# Altium PCB USB-C Charger.PcbDoc
Units mil, origin at the board's own origin, x right, y up, seen from the top; angles counter-clockwise.
Board outline 2450 x 800 mil, 2 copper layers (Top Layer, Bottom Layer); 29 components, 19 nets, 133 pads, 20 vias.
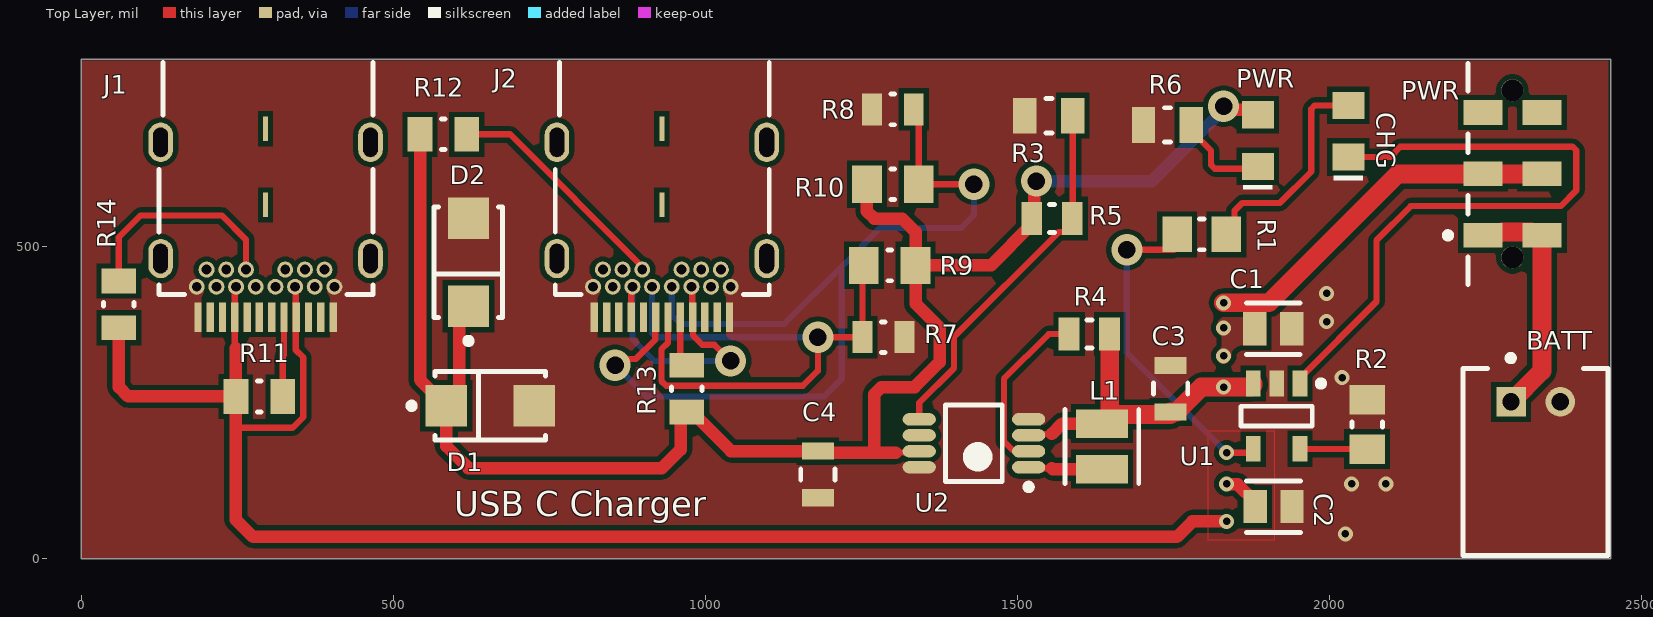
[diagram p0: Top Layer view]
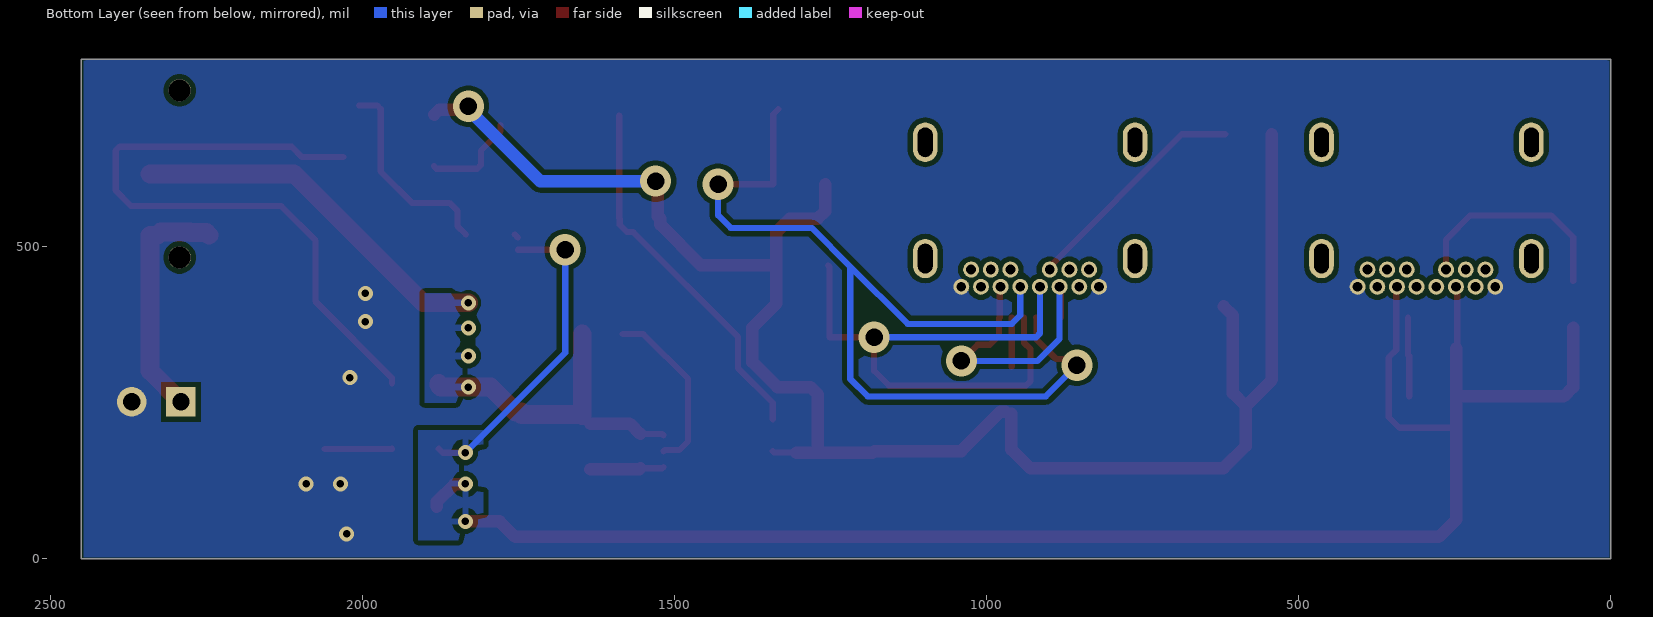
[diagram p1: Bottom Layer view, seen from below]
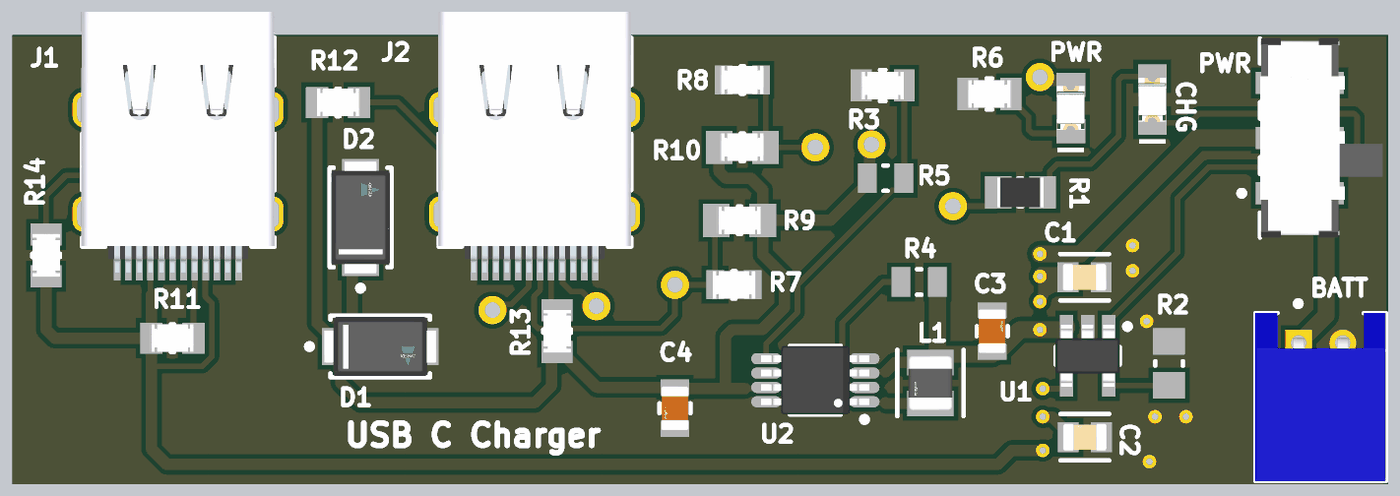
[diagram p2: 3D render of the assembled board from above, using the file's embedded part models]

## Layer stack, top to bottom
Top Solder: solder mask 0.4, Solder Resist, Dk 3.5
Top Layer: signal copper 1.4
Dielectric 1: dielectric 12.6, FR-4, Dk 4.8
Bottom Layer: signal copper 1.4
Bottom Solder: solder mask 0.4, Solder Resist, Dk 3.5

## Board outline
0,0 2450,0 2450,800 0,800

## Design rules (kind name [scope] priority, off if disabled: settings)
Clearance [All] p1: gap=8 ignorepadtopadclearanceinfootprint=TRUE
MinimumSolderMaskSliver [All] p1: minsoldermaskwidth=4
PolygonConnect [All] p1: connectstyle=Direct reliefconductorwidth=10 reliefentries=4 polygonreliefangle="90 Angle" airgapwidth=10
RoutingVias [All] p1: holewidth=28 width=50 viastyle="Through Hole" minholewidth=28 minwidth=50 maxholewidth=28 maxwidth=50
SilkToSolderMaskClearance [IsPad] p1: minsilkscreentomaskgap=5 clearancetoexposedcopper=TRUE
SolderMaskExpansion [All] p1: expansion=0 istentingtop=FALSE
SupplyNets "Schematic Supply Nets_1" [InNet('+5')] p1: voltage=0.000
SupplyNets "Schematic Supply Nets" [InNet('GND')] p2: voltage=0.000
Width PowerNets [InNetClass('PowerNets')] p1: maxlimit=50 minlimit=5 preferedwidth=20 minimp=50.000000 maximp=50.000000 favimp=50.000000
Width [All] p2: maxlimit=10 minlimit=10 preferedwidth=10
28 further rules are at their usual default settings.

## Classes and differential pairs
net class PowerNets: 5VIN +5 NetBATT_1 NetC1_1 NetL1_2
component class "Step-Up DC-DC Converter": C3 C4 D1 D2 L1 pwr R3 R4 R5 R6 R7 R8 R9 R10 R12 R13 U2
component class "Charge Controller": BATT C1 C2 CHG J1 PWR R1 R2 R11 R14 U1

## Components (designator, comment, footprint, x,y, rotation, side; value= is the part's Value field where it differs from the comment)
BATT "BATT" JST-S2B-PH-K-S_V 2330,155 r0 top
C1 "4.7uf" FP-C0805C475K8PACTU-MFG 1909.53,368.5 r0 top
C2 "4.7uf" FP-C0805C475K8PACTU-MFG 1910,83.5 r0 top
C3 "22uF" FP-GRM21B-0_15-MFG 1745,272.4 r90 top
C4 "22uF" FP-GRM21B-0_15-MFG 1180,135 r270 top
CHG "CHG" WL-SMCW_0805_150080xx75000 2030,685 r90 top (schematic designator LED1)
D1 "40V/1.5A" FP-95400-MFG 655,245 r0 top value=134pF
D2 "40V/1.5A" FP-95400-MFG 620,475 r90 top value=134pF
J1 "632723100011" 632723100011 295,620 r180 top
J2 "632723100011" 632723100011 930,620 r180 top
L1 "2.2uH" FP-LQM2HPN_G0-IPC_C 1635,180 r270 top
PWR "PWR" FP-JS102011JAQN-MFG 2292.76,616.57 r90 top (schematic designator SW1)
PWR "PWR" WL-SMCW_0805_150080xx75000 1885,670 r90 top (schematic designator LED2)
R1 "1k" RESC2013X60X35ML10T20 1795,519.68 r0 top
R2 "2k" RESC2013X60X35ML10T20 2060,215 r270 top
R3 "100k" FP-CRCW0805-e3-MFG 1550,710 r0 top
R4 "750k" RESC2013X50X30LL20T20 1615,360 r0 top
R5 "750k" RESC2013X50X30LL20T20 1555,545 r180 top
R6 "4.7k" FP-CRCW0805-e3-MFG 1740,695 r0 top
R7 "49.9k" FP-CRCW0805-e3-IPC_C 1285,355 r180 top
R8 "49.9k" FP-CRCW0805-e3-IPC_C 1300,720 r0 top
R9 "75k" FP-CRCW0805-e3-IPC_A 1295,470 r180 top
R10 "75k" FP-CRCW0805-e3-IPC_A 1300,600 r0 top
R11 "56k" FP-CRCW0805-e3-IPC_B 285,260 r0 top
R12 "56k" FP-CRCW0805-e3-IPC_B 580,680 r0 top
R13 "56k" FP-CRCW0805-e3-IPC_B 970,272.56 r90 top
R14 "56k" FP-CRCW0805-e3-IPC_B 59.95,407.44 r90 top
U1 "MCP73831" SOT95P280X145-5N 1915,228.5 r270 top
U2 "PAM2401" TSOP65P490X110-8N 1430,185 r180 top

## Footprints (in the part's own frame and the unit in brackets; to place one, negate y for a bottom-side part, rotate by r counter-clockwise, add the part's x,y. Pads: shape width x height; smd on the part's side, far side on the other; paste and mask are expansions set on the pad)
632723100011 [mm] "USB 3.1 Type C Receptacle Horizontal THR"
  rect 0.3x1.2 smd: A1(-2.75,5.93) A2(-2.25,5.93) A3(-1.75,5.93) A4(-1.25,5.93) A5(-0.75,5.93) A6(-0.25,5.93) A7(0.25,5.93) A8(0.75,5.93) A9(1.25,5.93) A10(1.75,5.93) A11(2.25,5.93) A12(2.75,5.93)
  round 0.65 hole 0.4: B1(2.8,4.68) B2(2.4,3.98) B3(1.6,3.98) B4(1.2,4.68) B5(0.8,3.98) B6(0.4,4.68) B7(-0.4,4.68) B8(-0.8,3.98) B9(-1.2,4.68) B10(-1.6,3.98) B11(-2.4,3.98) B12(-2.8,4.68) Shell(-2,4.68) Shell(2,4.68)
  oval 1x1.6 hole 0.6 slot 1.2 at 90 deg: Shell(-4.27,3.53) Shell(-4.27,-1.2) Shell(4.27,3.53) Shell(4.27,-1.2)
  rect 0.2x1 smd: Shell(0,1.35) Shell(0,-1.75)
  silkscreen extent -4.37,-4.45 4.34,5, body extent -4.37,-5.62 4.37,6.2, height 3.05
FP-95400-MFG [mm]
  rect 1.7x1.68 smd paste+0 mask+0: 1(-1.79,0) 2(1.79,0)
  silkscreen extent -3.32,-1.4 2.25,1.4, body extent -2.74,-1.5 2.74,1.5, height 0.25
FP-C0805C475K8PACTU-MFG [mm]
  rect 0.95x1.35 smd paste+0 mask+0: 1(-0.75,0) 2(0.75,0)
  silkscreen extent -1.1,-1.05 1.1,1.05, body extent -1.4,-0.85 1.4,0.85, height 0.25
FP-CRCW0805-e3-IPC_A [mil]
  rect 47.5x59.38 smd paste+0 mask+0: 1(-41.37,0) 2(41.37,0)
  silkscreen extent -3,-25 3,25, body extent -85,-49 85,49, height 10
FP-CRCW0805-e3-IPC_B [mil]
  rect 39.63x55.44 smd paste+0 mask+0: 1(-37.44,0) 2(37.44,0)
  silkscreen extent -3,-25 3,25, body extent -67,-38 67,38, height 10
FP-CRCW0805-e3-IPC_C [mil]
  rect 31.75x51.5 smd paste+0 mask+0: 1(-33.5,0) 2(33.5,0)
  silkscreen extent -3,-25 3,25, body extent -53,-31 53,31, height 10
FP-CRCW0805-e3-MFG [mm]
  rect 0.95x1.45 smd paste+0 mask+0: 1(-0.975,0) 2(0.975,0)
  silkscreen extent -0.13,-0.7 0.13,0.7, body extent -1.55,-0.82 1.55,0.82, height 0.25
FP-GRM21B-0_15-MFG [mm]
  rect 0.7x1.3 smd paste+0 mask+0: 1(-0.95,0) 2(0.95,0)
  silkscreen extent -0.23,-0.7 0.23,0.7, body extent -1.4,-0.8 1.4,0.8, height 0.25
FP-JS102011JAQN-MFG [mm]
  rect 1x1.6 smd paste+0 mask+0: 1(-2.5,-1.2) 1(-2.5,1.2) 2(0,1.2) 2(0,-1.2) 3(2.5,-1.2) 3(2.5,1.2)
  round 0.9 hole 0.9 unplated paste-2539.97 mask+0: ""(-3.4,0) ""(3.4,0)
  silkscreen extent -4.5,1.8 4.5,2.75, body extent -4.6,-3.9 4.6,2.1, height 0.25
FP-LQM2HPN_G0-IPC_C [mil]
  rect 45.47x82.92 smd paste+0 mask+0: 1(-36.44,0) 2(36.44,0)
  silkscreen extent -59,-59 59,59, body extent -63,-47 63,47, height 10
JST-S2B-PH-K-S_V [mm] "THD, 2-Leads, Body 7.6x5.9mm, Pitch 2mm"
  rect 1.2x1.2 hole 0.7: 1(-1,2.45)
  round 1.2 hole 0.7: 2(1,2.45)
  silkscreen extent -2.95,-3.8 2.95,4.35, body extent -2.95,-3.8 2.95,3.8, height 4.8
RESC2013X50X30LL20T20 [mm] "Chip Resistor, 2-Leads, Body 2.00x1.25mm, IPC High Density"
  rect 0.85x1.35 smd: 1(-0.825,0) 2(0.825,0)
  silkscreen extent -0.1,-0.58 0.1,0.58, body extent -1.1,-0.72 1.1,0.72, height 0.5
RESC2013X60X35ML10T20 [mm] "Chip Resistor, 2-Leads, Body 2.1x1.35mm, IPC Low Density"
  rect 1.2x1.45 smd: 1(-1,0) 2(1,0)
  silkscreen extent -0.1,-0.63 0.1,0.63, body extent -1.05,-0.68 1.05,0.67, height 0.6
SOT95P280X145-5N [mm] "SOT23, 5-Leads, Body 2.90x2.80mm, Pitch 0.95mm, IPC Medium Density"
  rect 1.05x0.6 smd: 1(-1.325,0.95) 2(-1.325,0) 3(-1.325,-0.95) 4(1.325,-0.95) 5(1.325,0.95)
  silkscreen extent -1.45,-1.45 0.4,1.93, body extent -1.4,-1.45 1.4,1.45, height 1.45
TSOP65P490X110-8N [mm] "TSOP, 8-Leads, Body 3.00x3.00mm, Pitch 0.65mm, IPC Medium Density"
  oval 1.35x0.5 smd: 1(-2.225,0.975) 2(-2.225,0.325) 3(-2.225,-0.325) 4(-2.225,-0.975) 5(2.225,-0.975) 6(2.225,-0.325) 7(2.225,0.325) 8(2.225,0.975)
  silkscreen extent -2.35,-1.55 1.15,1.9, body extent -2.45,-1.55 2.45,1.55, height 1.1
WL-SMCW_0805_150080xx75000 [mm] "SMD Mono-color Chip LED, body 2.0x1.25mm"
  rect 1.1x1.3 smd: 1(-1.05,0) 2(1.05,0)
  silkscreen extent -2,-0.6 -1.8,0.6, body extent -1,-0.63 1,0.62, height 0.7

## Part data
BATT: library part CMP-1755-00004-1, "Male Header, Pitch 2 mm, 1 x 2 Position, Height 4.8 mm, Tail Length 3.4 mm, -25 to 85 degC, RoHS, Bulk", Capacitance="10 uF", Case\Package=Radial, Max Operating Temperature="85 degC", Min Operating Temperature="-40 degC", Package Quantity=200, Tolerance=20%, Voltage Rating="50 V", ComponentLink1Description=Datasheet, ComponentLink1URL=http://www.jst-mfg.com/product/pdf/eng/ePH.pdf, DatasheetVersion=Dec-12, Diameter="5 mm", Height="11 mm", Lead Pitch="2 mm", Length="11 mm", Mount="Through Hole", PackageDescription="Male Header, Pitch 2 mm, 1 x 2 Position, Height 4.8 mm, Tail Length 3.4 mm", PackageReference=S2B-PH-K-S, Packaging=Bulk, Pins=2, Radiation Hardening=No, REACH SVHC="No SVHC", RoHSCompliant=true, Voltage Rating (DC)="50 V"
C1 C2: library part CMP-2007-01007-2, "CAP CER 4.7UF 10V X5R 0805", Capacitance=4.7uF, Case Code (Imperial)=0805, Case Code (Metric)=2012, Dielectric=X5R, Dielectric Material=Ceramic, Max Operating Temperature=85°C, Min Operating Temperature=-55°C, Package Quantity=1, Tolerance=10%, Voltage=10V, Case/Package=0805, Construction=Flat, Depth=1.25mm, Dissipation Factor=5%, Height=1.25mm, Lead Free="Lead Free", Lead Pitch=0.75mm, Length=2mm, Mount="Surface Mount", Number of Pins=2, Packaging="Tape and Reel", Radiation Hardening=No, REACH SVHC="No SVHC", RoHS Compliant=Yes, Series=C, Termination=SMD/SMT, Thickness=0.055inch, Voltage Rating=10V, Voltage Rating (DC)=10V, Width=1.2mm
C3 C4: library part CMP-2007-03385-2, "Chip Multilayer Ceramic Capacitors for General Purpose, 0805, 22uF, X5R, 15%, 20%, 6.3V", Case Code (Imperial)=0805, Case Code (Metric)=2012, Dielectric=X5R, Max Operating Temperature=85°C, Min Operating Temperature=-55°C, Package Quantity=1, Tolerance=20%, Voltage=6.3V, Capacitance=22uF, Case/Package=0805, Depth=1.25mm, Height=1.25mm, Lead Free="Lead Free", Length=2mm, Material=Ceramic, Mount="Surface Mount", Packaging="Tape and Reel", Radiation Hardening=No, REACH SVHC="No SVHC", Termination=SMD/SMT, Thickness=0.053inch, Voltage Rating=6.3V, Voltage Rating (DC)=6.3V, Width=0.049inch
CHG: library part CMP-1426-00010-4, "Led, Red, 630 Nm, 1.9 V, 30 Ma, 60 Mcd Rohs Compliant: Yes", Case Code (Imperial)=0805, Case Code (Metric)=2012, Color=Red, Forward Current=100mA, Forward Voltage=1.9V, Max Junction Temperature (Tj)=95°C, Max Operating Temperature=85°C, Max Reverse Voltage (DC)=5V, Min Operating Temperature=-40°C, Power Dissipation=72mW, Test Current=20mA, Case/Package=0805, Dominant Wavelength=630nm, Height=700µm, Length=2mm, Lens Style="Clear, Rectangular", Luminous Intensity=60mcd, Mount="Surface Mount", Packaging="Tape and Reel", Peak Wavelength=645nm, REACH SVHC=Unknown, Reverse Voltage=5V, RoHS=Compliant, Viewing Angle=140°, Wavelength=630nm, Width=1.25mm
D1 D2: library part CMP-02539-000025-1, "DIODE SCHOTTKY 40V 1.5A SMA", Capacitance=134pF, Forward Current=1.5A, Manufacturer=Vishay, Manufacturer Part Number=VS-15MQ040NTRPBF, Max Junction Temp=+150°C, Max Repetitive Reverse Voltage=40V, Max Surge Forward Current=140A, Package=95400, Peak Reverse Current=0.5mA, Temperature="-40°C to +150°C", Temperature Range Low=-40°C, Automotive=No, Category=Diode, ComponentLink2Description=Datasheet, ComponentLink2URL=http://www.vishay.com/docs/94141/vs-15mq040ntrpbf.pdf, Device Class L1="Discrete Semiconductors", Device Class L2=Diodes, Device Class L3="Schottky Diodes", Digikey Description="DIODE SCHOTTKY 40V 1.5A SMA", Footprint Url=http://www.vishay.com/docs/95400/sma.pdf, Height=2.29mm, Lead Free=Yes, Mouser Description="Schottky Diodes & Rectifiers 2.1 Amp 40 Volt", Octopart=https://octopart.com/vs-15mq040ntrpbf-vishay-44340959, Reverse Voltage=40V, RoHS=TRUE, Standoff Height=0mm, Temperature Range High=+150°C
J1 J2: library part CMP-1502-03213-4, "USB Connector, 24 Contact(s), Female, Right Angle, Solder and Surface Mount Terminal, Receptacle", Contact Resistance=30mΩ, Current Rating=5A, Insulation Resistance=1GΩ, Max Operating Temperature=105°C, Min Operating Temperature=-40°C, Voltage Rating=20V, Connector Type=USB, Contact Material="Gold, Nickel", Gender=Receptacle, Height=3.16mm, Mount="Surface Mount, Through Hole", Number Of Contacts=24, Number of Pins=24, Orientation=Horizontal, Packaging="Tape and Reel", Pin Length=1.5mm, RoHS=Compliant, USB Standard="USB 3.1"
L1: library part CMP-06042-017002-1, "Multilayer Type Inductor for Power Lines, 1008 (2520), 2.2μH, 20%, 0.225Ω, 1100mA", Case/Package=1008, Current Rating=1.1A, DC Resistance (DCR)=225mR, Max Operating Temperature=85°C, Min Operating Temperature=-40°C, Package Quantity=3000, Self Resonant Frequency=40MHz, Test Frequency=1MHz, Tolerance=20%, Height - Seated (Max)=0.039inch, Inductance=2.2uH, Length=0.098inch, Mount="Surface Mount", Packaging="Tape and Reel", RoHS Compliant=Yes, Shielding=Shielded, Width=0.079inch
PWR: library part CMP-10038-000001-1, "SWITCH SLIDE SPDT 300MA 6V", Contact Current Rating=300mA, Contact Resistance=70mΩ, Manufacturer=C&K, Manufacturer Part Number=JS102011JAQN, Temperature="-40°C to +85°C", Temperature Range High=+85°C, Temperature Range Low=-40°C, Voltage Rating Dc=6V, Automotive=No, Category=Switch, ComponentLink2Description=Datasheet, ComponentLink2URL=https://www.ckswitches.com/media/1422/js.pdf, Device Class L1=Electromechanical, Device Class L2=Switches, Device Class L3="Slide Switches", Digikey Description="SWITCH SLIDE SPDT 300MA 6V", Electromechanical Life=5000Cycles, Height=3.5mm, Lead Free=Yes, Mount="Surface Mount", Mouser Description="JS Series Sub-Miniature Slide Switch SPDT Right-Angle SMT", Octopart=https://octopart.com/js102011jaqn-c%26k+components-74831566, Package=JS102011JAQN, RoHS=TRUE, Throw Configuration=SPDT
PWR: library part CMP-1426-00008-7, "Led, Blue, 470 Nm, 3.2 V, 30 Ma, 145 Mcd Rohs Compliant: Yes", Case Code (Imperial)=0805, Case Code (Metric)=2012, Color=Blue, Forward Current=100mA, Forward Voltage=3.2V, Max Junction Temperature (Tj)=95°C, Max Operating Temperature=85°C, Max Reverse Voltage (DC)=5V, Min Operating Temperature=-40°C, Power Dissipation=105mW, Test Current=20mA, Case/Package=0805, Dominant Wavelength=470nm, Height=700µm, Lead Free="Lead Free", Length=2mm, Lens Style="Clear, Rectangular", Luminous Intensity=145mcd, Mount="Surface Mount", Packaging="Tape and Reel", Peak Wavelength=465nm, REACH SVHC=Unknown, Reverse Voltage=5V, RoHS=Compliant, Viewing Angle=140°, Wavelength=470nm, Width=1.25mm
R1: library part CMP-2100-03671-1, "Chip Resistor, 1 KOhm, +/- 1%, 125 mW, -55 to 155 degC, 0805 (2012 Metric), RoHS, Tape and Reel", Case Code (Imperial)=0805, Case Code (Metric)=2012, Manufacturer=Yageo, Max Operating Temperature=155degC, Max Power Dissipation=125mW, Min Operating Temperature=-55degC, Package Description="2-Pin Surface Mounted Device, Body 2 x 1.25 mm", Package Quantity=1, Resistance=1KOhm, Temperature Coefficient=100ppm/degreesC, Tolerance=1%, Voltage Rating=150V, Case/Package=0805, Composition=ThickFilm, Datasheet URL=http://www.yageo.com/NewPortal/yageodocoutput?fileName=/pdf/R-Chip/PYu-RC_Group_51_RoHS_L_5.pdf, Datasheet Version="Rev. 5, 10/2016", Depth=1.25mm, Height=0.024inch, Lead Free=LeadFree, Length=0.079inch, Manufacturer URL=http://www.yageo.com/, Military Standard=Not, Number of Pins=2, Number of Terminations=2, Package Reference=0805, Packaging=TapeandReel, Power Rating=125mW, REACH SVHC=Unknown, RoHSCompliant=true, Termination=SMD/SMT, Voltage Rating (DC)=150V, Width=0.049inch
R2: library part CMP-2001-01361-1, Manufacturer=Yageo, Part Number=RC0805JR-072KL
R3: library part CMP-2001-04899-2, "RES Thick Film, 100kΩ, 1%, 0.125W, 100ppm/°C, 0805", Case Code (Imperial)=0805, Case Code (Metric)=2012, Max Operating Temperature=155°C, Min Operating Temperature=-55°C, Package Quantity=5000, Power Rating=125mW, Resistance=100kR, Temperature Coefficient=100ppm/°C, Tolerance=1%, Voltage Rating=150V, Case/Package=0805, Composition="Thick Film", Contact Plating=Tin, Depth=1.25mm, Height=0.45mm, Lead Free="Lead Free", Length=2mm, Military Standard=Not, Mount="Surface Mount", Number of Pins=2, Packaging="Tape and Reel", Radiation Hardening=No, Termination=SMD/SMT, Voltage Rating (DC)=150V, Weight=0.000194oz, Width=1.25mm
R4 R5: library part CMP-2001-04102-1, Manufacturer="Vishay Dale", Part Number=CRCW0805750KFKEA
R6: library part CMP-2001-03939-2, "RES Thick Film, 47kΩ, 1%, 0.125W, 100ppm/°C, 0805", Case Code (Imperial)=0805, Case Code (Metric)=2012, Max Operating Temperature=155°C, Max Power Dissipation=125mW, Min Operating Temperature=-55°C, Package Quantity=10, Resistance=47kR, Temperature Coefficient=100ppm/°C, Tolerance=1%, Voltage Rating=150V, Case/Package=0805, Composition="Thick Film", Contact Plating=Tin, Depth=1.25mm, Features="Automotive AEC-Q200", Height=0.45mm, Lead Free="Lead Free", Length=2mm, Military Standard=Not, Number of Terminations=2, Packaging="Tape and Reel", Power Rating=125mW, Radiation Hardening=No, Termination=SMD/SMT, Voltage Rating (DC)=150V, Weight=0.000194oz, Width=1.25mm, Working Voltage=150V
R7 R8: library part CMP-2001-03952-2, "RES Thick Film, 49.9kΩ, 1%, 0.125W, 100ppm/°C, 0805", Case Code (Imperial)=0805, Case Code (Metric)=2012, Max Operating Temperature=155°C, Max Power Dissipation=125mW, Min Operating Temperature=-55°C, Package Quantity=10, Resistance=49.9kR, Temperature Coefficient=100ppm/°C, Tolerance=1%, Voltage Rating=150V, Case/Package=0805, Composition="Thick Film", Contact Plating=Tin, Depth=1.25mm, Features="Automotive AEC-Q200", Height=0.45mm, Lead Free="Lead Free", Length=2mm, Military Standard=Not, Mount="Surface Mount", Number of Terminations=2, Packaging="Tape and Reel", Power Rating=125mW, Radiation Hardening=No, Termination=SMD/SMT, Voltage Rating (DC)=150V, Weight=0.000194oz, Width=0.049inch
R9 R10: library part CMP-2001-04106-2, "RES Thick Film, 75kΩ, 1%, 0.125W, 100ppm/°C, 0805", Case Code (Imperial)=0805, Case Code (Metric)=2012, Max Operating Temperature=155°C, Max Power Dissipation=125mW, Min Operating Temperature=-55°C, Package Quantity=10, Resistance=75kR, Resistance Tolerance=1%, Resistor Type="Thick Film", Temperature Coefficient=100ppm/°C, Voltage Rating=150V, Case/Package=0805, Construction=Rectangular, Contact Plating=Tin, Depth=1.25mm, Features="Automotive AEC-Q200", Height=0.45mm, Lead Free="Lead Free", Length=2mm, Military Standard=Not, Mount="Surface Mount", Number of Pins=2, Number of Terminations=2, Packaging="Tape and Reel", Power Rating=125mW, Radiation Hardening=No, RoHS Compliant=Yes, Series=CRCW, Technology="THICK FILM", Termination=SMD/SMT, Tolerance=1%, Voltage Rating (DC)=150V, Weight=0.000194oz, Width=0.049inch, Working Voltage=150V
R11 R12 R13 R14: library part CMP-2001-04015-2, "RES Thick Film, 56kΩ, 1%, 0.125W, 100ppm/°C, 0805", Case Code (Imperial)=0805, Case Code (Metric)=2012, Max Operating Temperature=155°C, Max Power Dissipation=125mW, Min Operating Temperature=-55°C, Package Quantity=10, Resistance=56kR, Temperature Coefficient=100ppm/°C, Tolerance=1%, Voltage Rating=150V, Case/Package=0805, Composition="Thick Film", Contact Plating=Tin, Depth=1.25mm, Features="Automotive AEC-Q200", Height=0.45mm, Lead Free="Lead Free", Length=2mm, Military Standard=Not, Mount="Surface Mount", Number of Pins=2, Number of Terminations=2, Packaging="Tape and Reel", Power Rating=125mW, Radiation Hardening=No, Termination=SMD/SMT, Voltage Rating (DC)=150V, Weight=0.000194oz, Width=1.25mm
U1: "MCP73831 Series Single-Cell Li-Ion/Li-Polymer Battery Charge Controller SOT-23-5", Ambient Temperature Range High=85°C, Case/Package=SOT-23, Drain to Source Resistance=350mΩ, Manufacturer=Microchip, Manufacturer Lifecycle Status=REL, Manufacturer Part Number=MCP73831T-2ACI/OT, Max Charge Current=500mA, Max Junction Temperature (Tj)=125°C, Max Output Voltage=4.5V, Max Power Dissipation=1.54W, Max Supply Voltage=6V, Min Operating Temperature=-40°C, Min Output Voltage=4.168V, Min Supply Voltage=3.75V, Output Voltage=4.2V, Voltage Rating=4.534V, Category="Battery Management", ComponentLink1Description=https://datasheet.octopart.com:443/MCP73831T-2ACI-OT-Microchip-datasheet-8814540.pdf?src-supplier=element14+APAC, ComponentLink1URL=https://datasheet.octopart.com:443/MCP73831T-2ACI-OT-Microchip-datasheet-8814540.pdf?src-supplier=element14+APAC, ComponentLink2Description=https://datasheet.octopart.com:443/MCP73831T-2ACI-OT-Microchip-datasheet-145017548.pdf?src-supplier=Microchip, ComponentLink2URL=https://datasheet.octopart.com:443/MCP73831T-2ACI-OT-Microchip-datasheet-145017548.pdf?src-supplier=Microchip, ComponentLink3Description=https://datasheet.octopart.com:443/MCP73831T-2ACI-OT-Microchip-datasheet-34193478.pdf?src-supplier=Farnell, ComponentLink3URL=https://datasheet.octopart.com:443/MCP73831T-2ACI-OT-Microchip-datasheet-34193478.pdf?src-supplier=Farnell, ComponentLink4Description=https://datasheet.octopart.com:443/MCP73831T-2ACI-OT-Microchip-datasheet-16123459.pdf?src-supplier=LKR, ComponentLink4URL=https://datasheet.octopart.com:443/MCP73831T-2ACI-OT-Microchip-datasheet-16123459.pdf?src-supplier=LKR, ComponentLink5Description=https://datasheet.octopart.com:443/MCP73831T-2ACI-OT-Microchip-datasheet-142675560.pdf?src-supplier=TME, ComponentLink5URL=https://datasheet.octopart.com:443/MCP73831T-2ACI-OT-Microchip-datasheet-142675560.pdf?src-supplier=TME, ComponentLink6Description=https://datasheet.octopart.com:443/MCP73831T-2ACI-OT-Microchip-datasheet-158592061.pdf?src-supplier=SHENGYU+ELECTRONICS, ComponentLink6URL=https://datasheet.octopart.com:443/MCP73831T-2ACI-OT-Microchip-datasheet-158592061.pdf?src-supplier=SHENGYU+ELECTRONICS, ComponentLink7Description=https://datasheet.octopart.com/MCP73831T-2ACI-OT-Microchip-datasheet-16593012.pdf, ComponentLink7URL=https://datasheet.octopart.com/MCP73831T-2ACI-OT-Microchip-datasheet-16593012.pdf, ComponentLink8Description=https://datasheet.octopart.com:443/MCP73831T-2ACI-OT-Microchip-datasheet-7127743.pdf?src-supplier=Newark, ComponentLink8URL=https://datasheet.octopart.com:443/MCP73831T-2ACI-OT-Microchip-datasheet-7127743.pdf?src-supplier=Newark, ComponentLink9Description=https://datasheet.octopart.com:443/MCP73831T-2ACIOT-Microchip-datasheet-39874.pdf?src-supplier=RS+(Formerly+Allied+Electronics), ComponentLink9URL=https://datasheet.octopart.com:443/MCP73831T-2ACIOT-Microchip-datasheet-39874.pdf?src-supplier=RS+(Formerly+Allied+Electronics), ComponentLink10Description=http://sigma.octopart.com:80/188449423/materials_sheet/Microchip-MCP73831T-2ACI-OT.pdf?src-supplier=Compliance+Statements, ComponentLink10URL=http://sigma.octopart.com:80/188449423/materials_sheet/Microchip-MCP73831T-2ACI-OT.pdf?src-supplier=Compliance+Statements, ComponentLink11Description=http://sigma.octopart.com:80/192856963/materials_sheet/Microchip-MCP73831T-2ACI-OT.pdf?src-supplier=Compliance+Statements, ComponentLink11URL=http://sigma.octopart.com:80/192856963/materials_sheet/Microchip-MCP73831T-2ACI-OT.pdf?src-supplier=Compliance+Statements, ComponentLink12Description=http://sigma.octopart.com:80/rohs_statement/Microchip-company-71.pdf?src-supplier=Compliance+Statements, ComponentLink12URL=http://sigma.octopart.com:80/rohs_statement/Microchip-company-71.pdf?src-supplier=Compliance+Statements, ComponentLink13Description=http://sigma.octopart.com:80/reach_statement/Microchip-company-70.pdf?src-supplier=Compliance+Statements, ComponentLink13URL=http://sigma.octopart.com:80/reach_statement/Microchip-company-70.pdf?src-supplier=Compliance+Statements, ComponentLink14Description=http://sigma.octopart.com:80/conflict_mineral_statement/Microchip-company-69.pdf?src-supplier=Compliance+Statements, ComponentLink14URL=http://sigma.octopart.com:80/conflict_mineral_statement/Microchip-company-69.pdf?src-supplier=Compliance+Statements, ComponentLink15Description=http://sigma.octopart.com:80/conflict_mineral_statement/Microchip-company-68.pdf?src-supplier=Compliance+Statements, ComponentLink15URL=http://sigma.octopart.com:80/conflict_mineral_statement/Microchip-company-68.pdf?src-supplier=Compliance+Statements, Contact Plating=Tin, Country of Assembly=Thailand, Country of Fabrication="United States of America", Country of Origin=Thailand, Export Control Classification Number (ECCN) Code=EAR99, Harmonized Tariff Schedule (HTS) Code=8542.39.0060, Height=1.45mm, HS Code=8542.39.0090, Introduction Date=2005-11-03, Length=3.0988mm, Lifecycle Status=Production, Max Operating Temperature=85°C, Mounting Technology="Surface Mount", Nominal Supply Voltage=6V, Number of Cells=1, Number of Channels=1, Number of Outputs=1, Output Current=500mA, Packaging="Cut Tape", Pins=5, Pricing="1=0.545 (USD)", Projected EOL Date=2034-11-03, Radiation Hardening=No, REACH SVHC=No, RoHS=Compliant, Schedule B="8542390000, 8542390000|8542390000|8542390000|8542390000|8542390000", Stock=10360, Supplier=Newark, Supplier Part Number=MCP73831T-2ACI/OT, Termination=SMD/SMT, Weight=200.998119mg, Width=1.8034mm
U2: "1.0MHz STEP-UP DC-DC CONVERTER"

## Via types
v1: diameter 24, hole 12, Top Layer to Bottom Layer, 13 vias
v2: diameter 50, hole 28, Top Layer to Bottom Layer, 7 vias

## Nets (pads, with @x,y where several pads share a name; then routed paths per layer and width w, separated by ;. In a path a pad name is that pad's centre, name@x,y a point inside that pad or via, vN(x,y) a via of type N, cw(c..) or ccw(c..) an arc to the next point about the centre after c; other vN are vias at no path point)
5V: J2.A4 J2.A9 J2.B4 J2.B9 | length 461.6
  Top Layer w10: J2.A9 880.79,433.78 J2.B4 ; J2.B9 978.65,434.35 978.65,387.1 J2.A4 979.99,385.76 979.99,357.53 994.71,342.81 1014.24,342.81 v2(1040.06,317)
  Bottom Layer w10: J2.B4 882.76,352.24 918,317 v2(1040.06,317)
5VIN: C2.1 J1.A4 J1.A9 J1.B4 J1.B9 R1.1 R11.1 R14.1 U1.4 | length 3186.1
  Top Layer w10: 247.56,210 338.35,210 355.25,226.89 355.25,322.59 343.43,334.41 343.43,434.56 J1.B9 ; 247.56,337.44 245.79,339.21 J1.A9 245.79,433.78 J1.B4 ; v2(1675,495) R1.1@1750.63,495 ; R1.1@1750.63,514.68 R1.1 ; v1(1835,170) 1871.26,170 U1.4
  Top Layer w20: R14.1 59.95,275.05 75,260 R11.1 ; 247.56,337.44 R11.1 ; v1(1835,60) 1780,60 1755,35 275,35 247.56,62.44 247.56,210 R11.1 ; v1(1835,120) 1835.77,119.23 1852.62,119.23 1880.47,91.38 C2.1
  Bottom Layer w10: v2(1675,495) 1675,330 v1(1835,170)
+5: C4.1 D1.1 D2.1 PWR.2@1885,711.34 R5.2 R9.1 R10.1 R12.1 R13.1 U2.7 | length 2830.2
  Top Layer w10: 1305,170 1305.35,170.35 1340.35,170.35 U2.7@1342.3,172.3
  Top Layer w20: R12.1 542.56,286.57 584.13,245 D1.1 ; D2.1 605,389.53 605,265.47 D1.1 ; R13.1@960,232.56 960,175 930,145 620,145 584.53,180.47 D1.1 ; R13.1 977.91,235.13 1040.64,172.4 C4.1 1182.4,170 1270,170 ; R10.1 1258.63,556.72 1270.34,545 1315,545 1336.37,523.63 R9.1 ; 1305,170 1270,170 ; v2(1530,605) 1526.26,601.26 1526.26,548.74 R5.2 1522.52,535.16 1457.36,470 R9.1 ; v2(1830.05,725) 1835.79,719.26 1877.08,719.26 PWR.2@1885,711.34 ; 1270,170 1270,263.28 1281.72,275 1335,275 1375,315 1375,370.22 1336.37,408.84 R9.1
  Bottom Layer w20: v2(1530,605) 1715.11,605 1830.05,719.95 v2(1830.05,725)
CC: J1.A5 R11.2 | length 127.4
  Top Layer w10: R11.2 322.44,324.66 324.53,326.75 J1.A5
"CC OUT": J2.A5 R13.2 | length 79.3
  Top Layer w10: J2.A5 959.53,307.91 R13.2@960,307.44
D+: J2.A6 J2.B6 R7.2 R9.2 | length 954.1
  Top Layer w10: J2.A6 939.84,346.11 929.28,335.54 929.28,284.8 936.89,277.19 1155.93,277.19 1180,301.26 v2(1180,355) R7.2 1251.5,467.87 R9.2
  Bottom Layer w10: J2.B6 914.25,360.86 920.11,355 v2(1180,355)
D-: J2.A7 J2.B7 R8.2 R10.2 | length 1561.9
  Top Layer w10: v2(855,310) 865.82,310 875.82,320 888.28,320 919.38,351.1 919.38,385.76 J2.A7 ; R8.2 1341.37,712.13 R10.2 v2(1430,600)
  Bottom Layer w10: v2(855,310) 905,260 1190,260 1218,288 1218,468 ; J2.B7 945.75,390.08 959.53,376.3 1126.3,376.3 1218,468 ; v2(1430,600) 1430,550 1410,530 1280,530 1218,468
GND: BATT.2 C1.2 C2.2 C3.2 C4.2 D1.2 D2.2 J1.A1 J1.A12 J1.B1 J1.B12 J2.A1 J2.A12 J2.B1 J2.B12 R2.1 R3.1 R6.1 R7.1 R8.1 U1.2 U2.4 U2.8
  other v1: 2025,40 2035,120 2090,120 2020,290 1995,380 1995,425
NetBATT_1: BATT.1 PWR.1@2245.51,518.15 PWR.1@2340,518.15 | length 386
  Top Layer w30: PWR.1@2245.51,518.15 2250.2,522.83 2275.29,522.83 2275.89,523.43 2322.91,523.43 2328.19,518.15 2340,518.15 2340,300.83 BATT.1
NetC1_1: C1.1 C3.1 L1.1 PWR.2@2245.51,616.57 PWR.2@2340,616.57 R4.2 U1.3 U2.3 | length 1100.1
  Top Layer w10: U2.3 1519.45,199.65 1554.65,199.65 1555,200
  Top Layer w20: 1555,200 1571.44,216.44 L1.1
  Top Layer w30: L1.1@1647.48,228.92 R4.2 ; L1.1@1649.66,231.1 C3.1@1745,231.1 ; C3.1 1754.37,235 1794.37,275 1874.41,275 1877.6,278.19 U1.3 ; v1(1830,410) 1902.75,410 2109.32,616.57 2245.51,616.57 PWR.2@2340,616.57
  other v1: 1830,275 1830,325 1830,370
NetL1_2: L1.2 U2.1 | length 118.7
  Top Layer w10: U2.1 1519.21,145 1555,145
  Top Layer w20: 1555,145 1556.44,143.56 L1.2
NetLED1_1: CHG.1 U1.1 | length 1071.6
  Top Layer w10: U1.1 1952.4,289.53 2075,412.13 2075,510 2130,565 2370,565 2395,590 2395,654.14 2389.14,660 2113.15,660 2096.81,643.66 CHG.1
NetLED1_2: CHG.2 R1.2 | length 329.3
  Top Layer w10: R1.2 1847.45,532.76 1847.45,557.37 1860.08,570 1920,570 1970.27,620.27 1970.27,720.48 1976.13,726.34 CHG.2@2005,726.34
NetLED2_1: PWR.1@1885,628.66 R6.2 | length 156.2
  Top Layer w10: R6.2 1778.39,685.16 1810,653.54 1810,630.86 1815.86,625 1881.34,625 PWR.1@1885,628.66
NetR2_2: R2.2 U1.5 | length 107.9
  Top Layer w10: U1.5 1953.11,175.63 R2.2
NetR3_2: R3.2 R5.1 U2.5 | length 593
  Top Layer w10: U2.5 1342.4,249.87 1398,305.47 1398,355.52 1565.91,523.43 1575.75,523.43 1587.48,535.16 R5.1 ; R5.1@1588.39,545.91 R3.2
NetR4_1: R4.1 U2.2 | length 280.3
  Top Layer w10: U2.2 1515.75,174.06 1492.3,174.06 1478.02,188.33 1478.02,288.02 1550,360 R4.1
VCONN: J1.B5 R14.2 | length 352.3
  Top Layer w10: R14.2 59.95,514.95 95,550 225,550 263.5,511.5 J1.B5
"VCONN OUT": J2.B5 R12.2 | length 373.7
  Top Layer w10: R12.2 686.79,680 895.52,471.27 895.52,466.29 J2.B5
pads on no net: J1.A2 J1.A3 J1.A6 J1.A7 J1.A8 J1.A10 J1.A11 J1.B2 J1.B3 J1.B6 J1.B7 J1.B8 J1.B10 J1.B11 J1.Shell J2.A2 J2.A3 J2.A8 J2.A10 J2.A11 J2.B2 J2.B3 J2.B8 J2.B10 J2.B11 J2.Shell PWR. PWR.3 U2.6

## Polygon pours and split planes (outlines as drawn)
GND on Top Layer "GND_L01_P005" (solid, pour order 5): 0,800 2.32,797.68 2446.3,797.68 2446.3,5.54 2440.76,0 0,0
NetC1_1 on Top Layer "NETC1_1_L01_P002" (solid, pour order 2): 1901.11,425 1901.11,250 1800,250 1800,425
5VIN on Top Layer "5VIN_L01_P000" (solid, pour order 0): 1911.11,205 1911.11,30 1805,30 1805,205
GND on Bottom Layer "GND_L02_P006" (solid, pour order 6): 2.32,797.68 2.32,2.32 2446.15,2.32 2446.15,797.53 2446.3,797.68 2443.98,800 0,800 1.16,798.84
5VIN on Bottom Layer "5VIN_L02_P004" (solid, pour order 4): 1910,30 1806,30 1806,206 1910,206 1815,197.01 1910,206
NetC1_1 on Bottom Layer "NETC1_1_L02_P003" (solid, pour order 3): 1900,250 1800,250 1800,425 1900,425 1840,425 1900,425

## Silkscreen, mask and mechanical layers (free items; w line width, h text height)
Top Overlay:
  text "USB C Charger" at 597.48,68.33 h40
Mechanical 1:
  lines w0: 0,0 0,800 ; 0,0 2450,0 ; 0,0 0,800 ; 0,0 2450,0 ; 0,800 2450,800 ; 0,800 2450,800 ; 2450,0 2450,800 ; 2450,0 2450,800

## Text inside footprints (layer, text, board x,y; h text height)
J1: Assembly Notes "PCB Edge" at 361.93,840.47 h24 r180
J2: Assembly Notes "PCB Edge" at 996.93,840.47 h24 r180